# Altium PCB car_V1.0.PcbDoc
Units mil, origin at the board's own origin, x right, y up, seen from the top; angles counter-clockwise.
Board outline 2762.23 x 1557.14 mil, 2 copper layers (Top Layer, Bottom Layer), stack 50.044 mil thick; 119 components, 73 nets, 335 pads, 63 vias.
Unrouted connection lines stored in the file: 42.
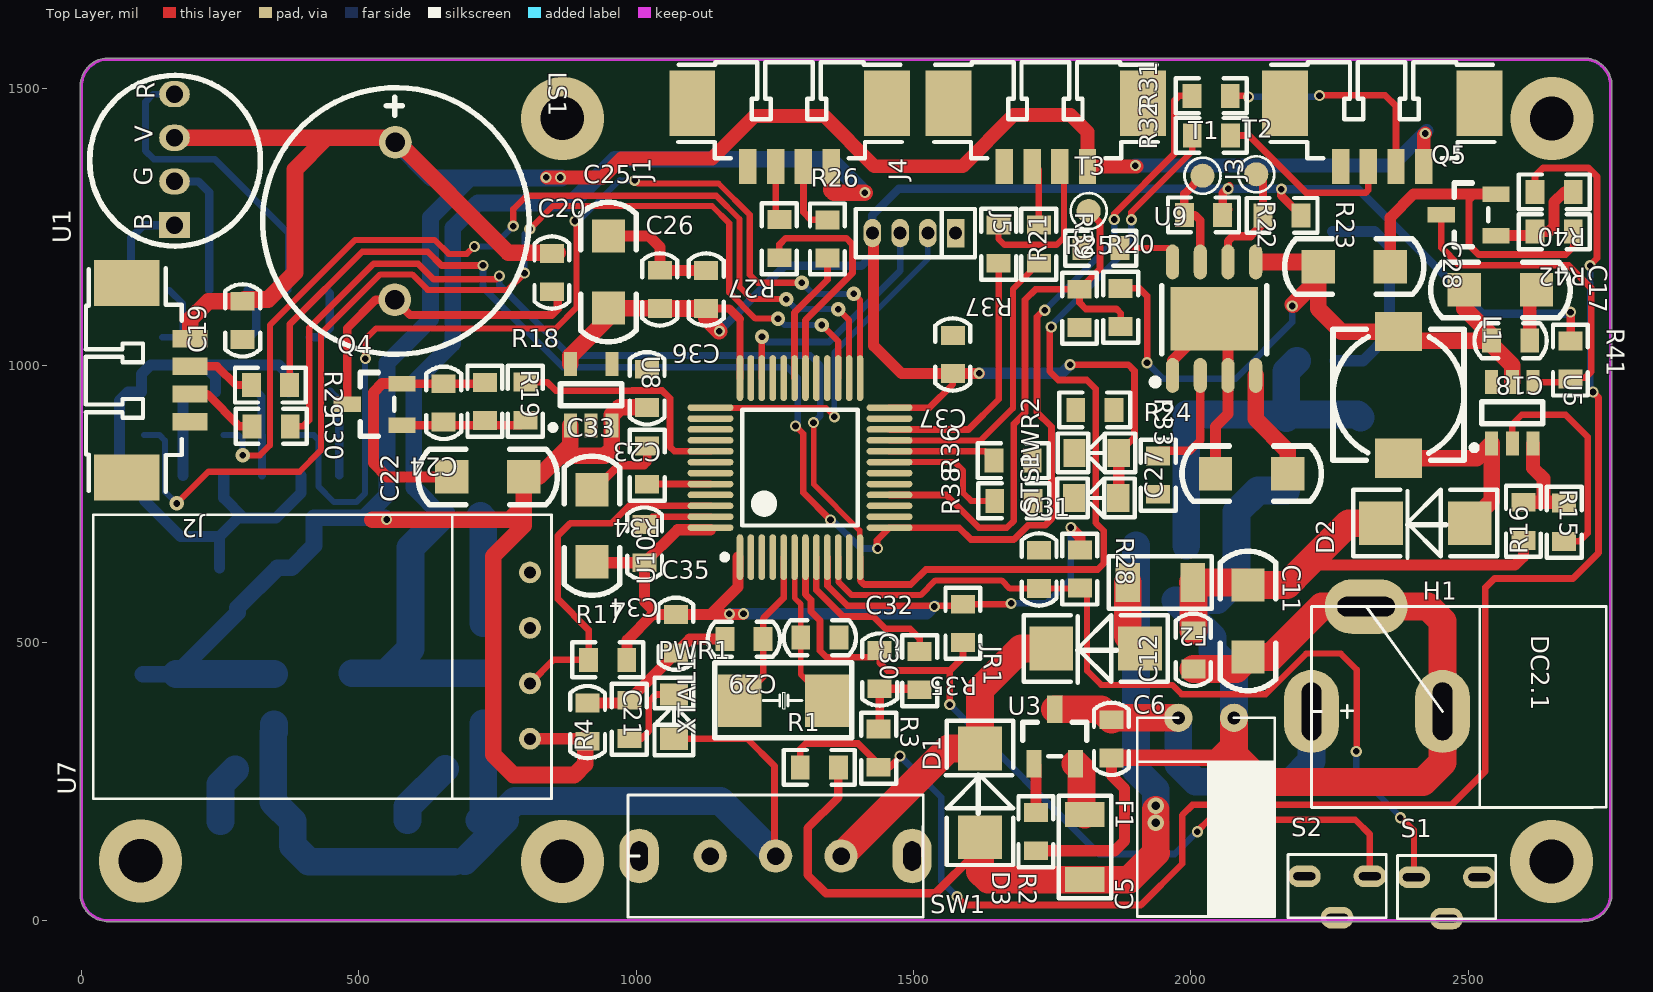
[diagram p0: Top Layer view]
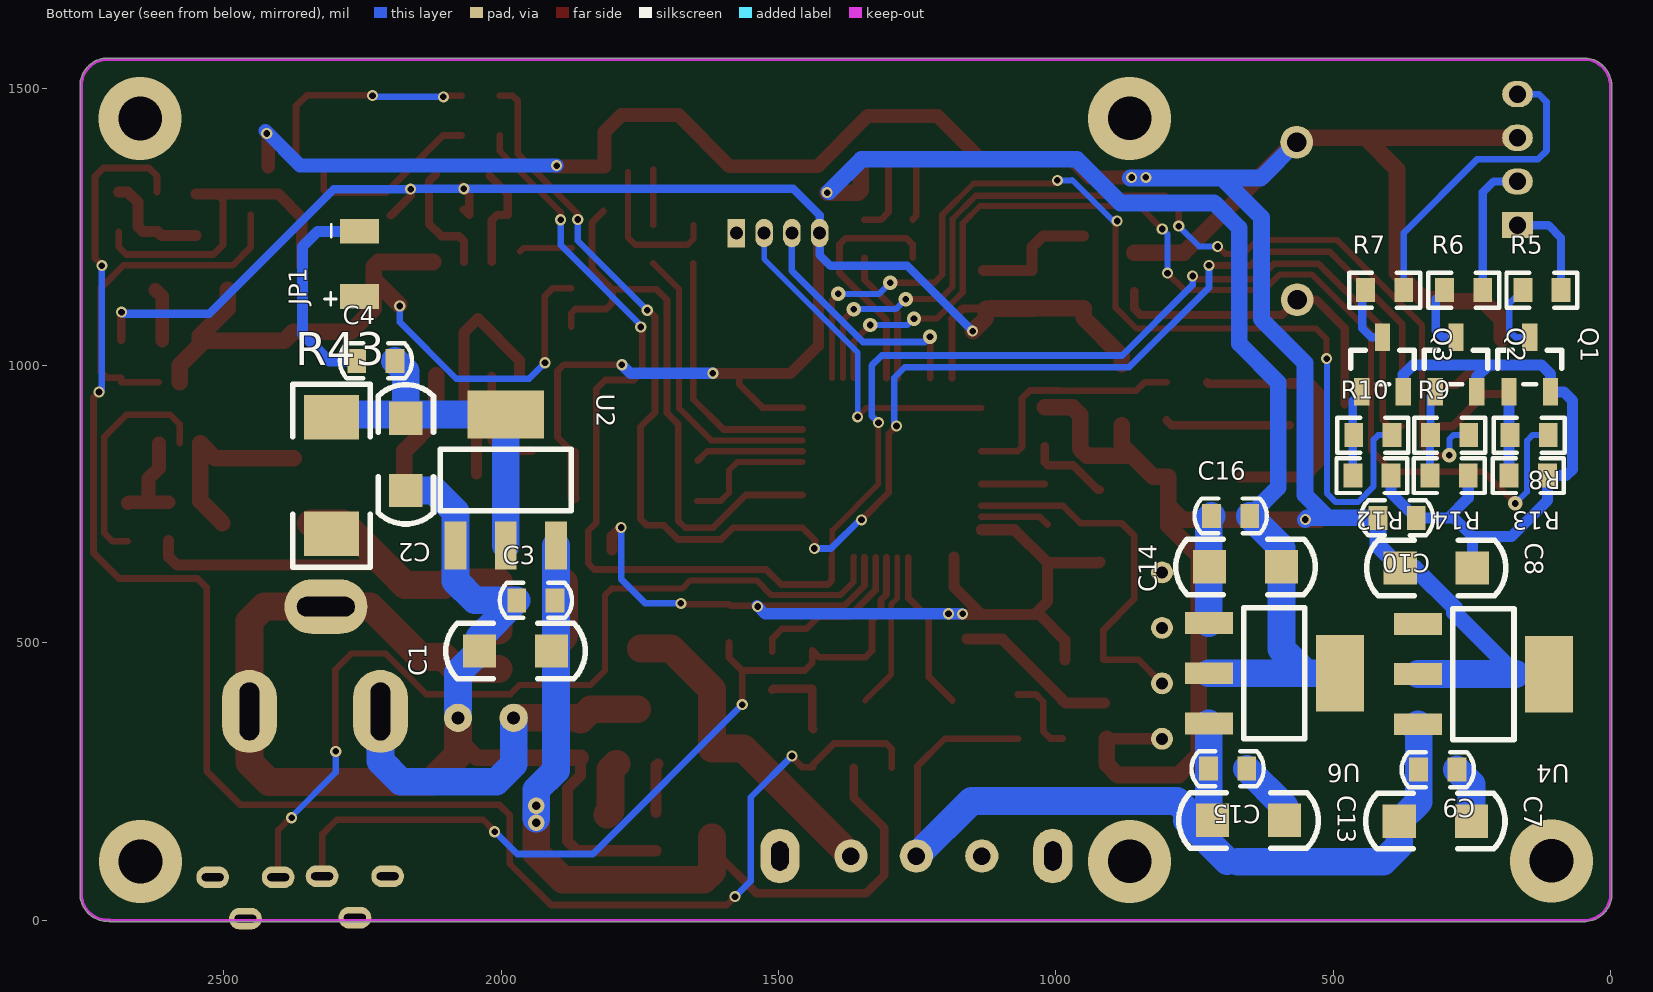
[diagram p1: Bottom Layer view, seen from below]
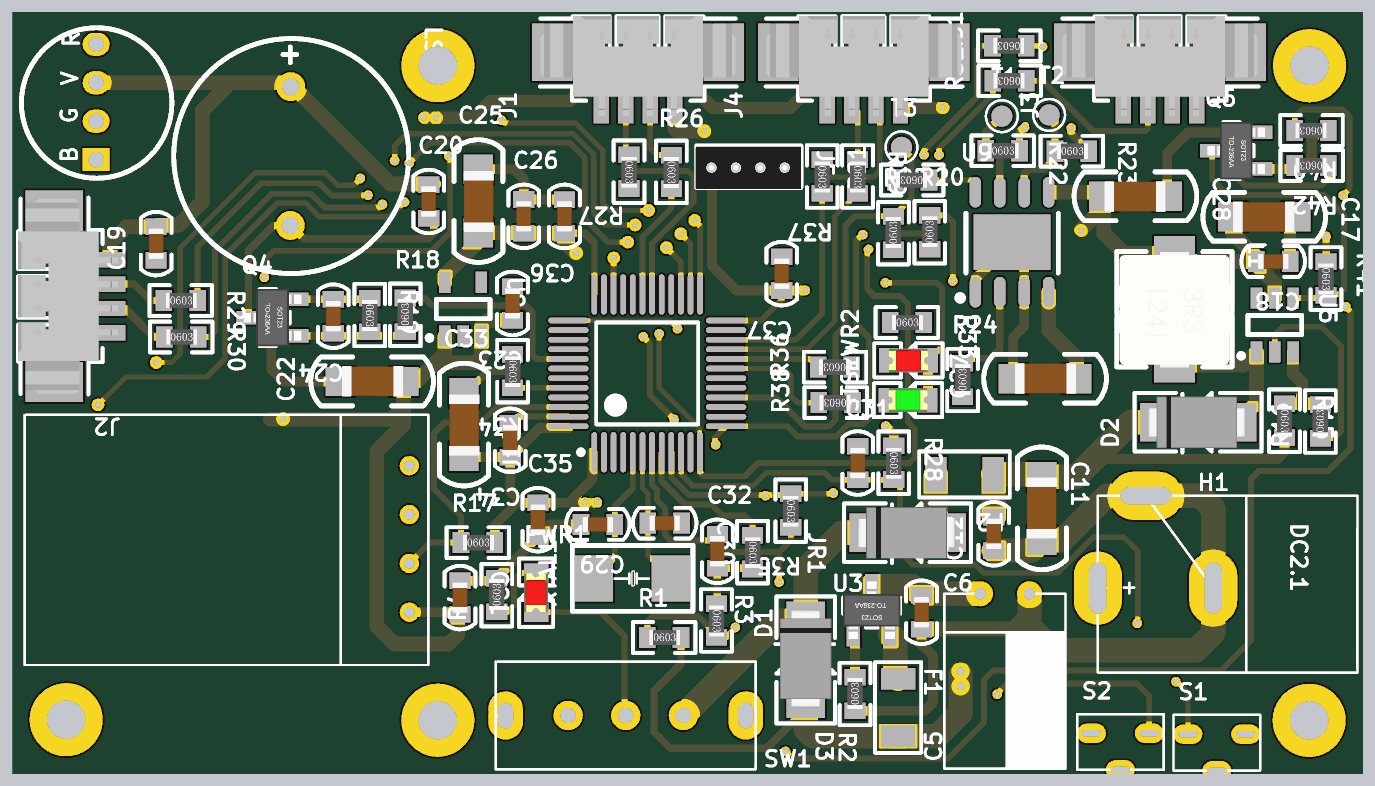
[diagram p2: 3D render of the assembled board from above, using the file's embedded part models]
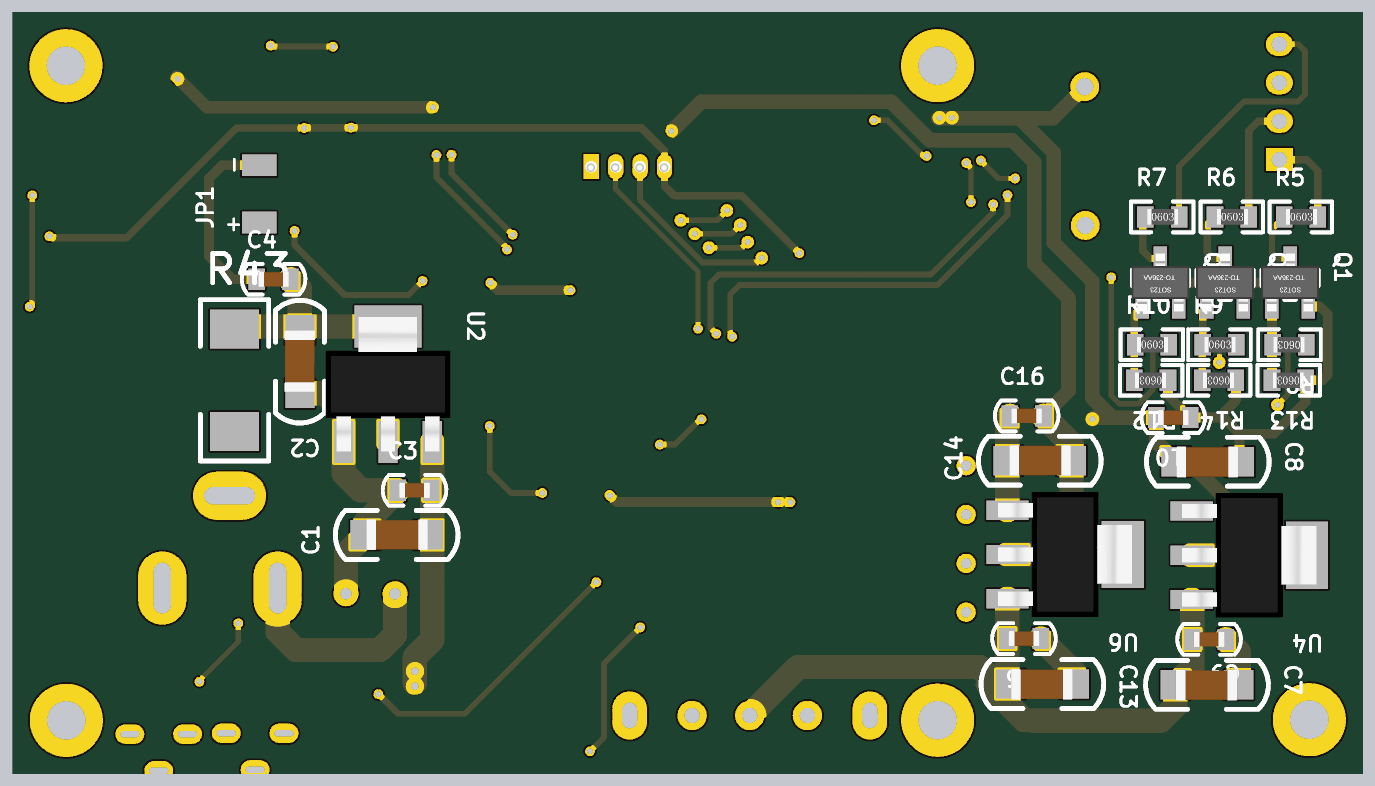
[diagram p3: 3D render of the assembled board from below, using the file's embedded part models]

## Layer stack, top to bottom
Top Solder: solder mask 0.4, Solder Resist, Dk 3.5
Top Layer: signal copper 1.4
Dielectric1: core 47.2441, FR-4, Dk 4.8
Bottom Layer: signal copper 1.4
Bottom Solder: solder mask 0.4, Solder Resist, Dk 3.5

## Board outline
-2.86,48.4 ccw(c47.23,47.37) 44.78,-2.67 ccw(c44.9,-0.16) 45.77,-2.51 2706.5,-2.51 ccw(c2706.5,0) 2707.64,-2.24 ccw(c2709.43,47.83) 2758.81,39.39 ccw(c2756.8,40.9) 2759.32,40.9 2759.32,1502.04 ccw(c2709.27,1504.43) 2759.37,1504.43 ccw(c2709.27,1504.43) 2713.6,1554.34 ccw(c2712.8,1551.96) 2712.8,1554.47 50.16,1554.47 ccw(c47.77,1504.43) -1.96,1510.47 ccw(c0,1508.9) -2.51,1508.9 -2.51,49.63 ccw(c-0.35,48.35)

## Design rules (kind name [scope] priority, off if disabled: settings)
Clearance [All] p1: gap=7.5
HoleSize [All] p1: absolutevalues=TRUE maxlimit=200 minlimit=1 maxpercent=80.000 minpercent=20.000
HoleToHoleClearance [All] p1: gap=2 allowstackedmicrovias=TRUE
MinimumSolderMaskSliver [All] p1: minsoldermaskwidth=-2
PolygonConnect PolygonConnect_1 [IsPad] p1: connectstyle=Relief reliefconductorwidth=10 reliefentries=4 polygonreliefangle="90 Angle" airgapwidth=10
PolygonConnect [All] p2: connectstyle=Direct reliefconductorwidth=10 reliefentries=4 polygonreliefangle="90 Angle" airgapwidth=10
RoutingVias [All] p1: holewidth=12 width=20 viastyle="Through Hole" minholewidth=12 minwidth=20 maxholewidth=28 maxwidth=50
SilkToSilkClearance [All] p1: silktosilkclearance=-10
SilkToSolderMaskClearance SilkscreenOverComponentPads [IsPad] p1: minsilkscreentomaskgap=-10 clearancetoexposedcopper=TRUE
SolderMaskExpansion [All] p1: expansion=4
Width [All] p1: maxlimit=80 minlimit=7 preferedwidth=10
25 further rules are at their usual default settings.

## Components (designator, comment, footprint, x,y, rotation, side; value= is the part's Value field where it differs from the comment)
C1 "10uF/16V" C1206C 1909.1,485.3 r0 bottom
C2 "22uF/16V" C1206C 2172.1,904.9 r270 bottom
C3 "0.1uF" C0603B 1937.5,576.6 r180 bottom
C4 "0.1uF" C0603B 2226.05,1008.6 r180 bottom
C5 "100uF/16V" CAP_6.3*7 1977.5,364.8 r90 top locked
C6 "0.1uF" C0603B 1856.9,327 r90 top
C7 "10uF/16V" C1206C 380.5,178.4 r180 bottom
C8 "22uF/16V" C1206C 378.8,635.1 r180 bottom
C9 "0.1uF" C0603B 311.2,271.5 r0 bottom
C10 "0.1uF" C0603B 384.55,725.3 r0 bottom
C11 "22uF/16V" C1206C 2103.2,604.5 r270 top
C12 "0.1uF" C0603B 2004.7,487.5 r90 top
C13 "10uF/16V" C1206C 717.4,179.9 r180 bottom
C14 "22uF/16V" C1206C 592.8,637.1 r0 bottom
C15 "0.1uF" C0603B 690.05,273 r0 bottom
C16 "0.1uF" C0603B 684.55,728.8 r180 bottom
C17 "22uF/16V" C1206C 2493.3,1136.5 r0 top
C18 "0.1uF" C0603B 2576.7,1044.9 r180 top
C19 "0.1uF" C0603B 290.2,1081.5 r90 top
C20 "0.1uF" C0603B 848.1,1167.7 r90 top
C21 "0.1uF" C0603B 912.2,357 r270 top
C22 "10uF/16V" C1206C 797.2,799.4 r180 top
C23 "0.1uF" C0603B 1019.5,959.05 r270 top
C24 "0.1uF" C0603B 652.8,932.9 r270 top
C25 "2.2uF/16V" C1206C 949.8,1103.6 r90 top
C26 "0.1uF" C0603B 1042.6,1137.3 r90 top
C27 "10uF/16V" C1206C 2174.7,805 r180 top
C28 "10uF/16V" C1206C 2229.7,1178.4 r0 top
C29 "22p" C0603B 1194.3,506.8 r180 top
C30 "22p" C0603B 1331.1,509.3 r0 top
C31 "0.1uF" C0603B 1726.3,632.4 r270 top
C32 "0.1uF" C0603B 1438.9,451.7 r90 top
C33 "4.7uF/16V" C1206C 920.2,646.1 r90 top
C34 "0.1uF" C0603B 1015,678.95 r270 top
C35 "0.1uF" C0603B 1071.7,516.4 r90 top
C36 "0.1uF" C0603B 1126,1137.2 r270 top
C37 "0.1uF" C0603B 1570.8,1020.05 r270 top
D1 "D Schottky" DO-214AC 1620.05,149.4 r90 top locked
D2 "D Schottky" DO-214AC 2502.9,716.15 r180 top
D3 "D Schottky" DO-214AC 1908.5,490 r180 top locked
F1 "3A/32V" LC-1206_L 1809,131.9 r270 top
F2 "3A/32V" LC-1206_L 1944.74,609 r180 top
H1 "DC" DC_2.1 2316.1,565.38 r180 top locked
J1 "UART1" SIPA4-1.27-SMT-H 1351.5,1359.1 r180 top
J2 "UART2" SIPA4-1.27-SMT-H 195.6,1048.7 r270 top locked
J3 "UART2" SIPA4-1.27-SMT-H 2420,1359.1 r180 top
J4 "UART3" SIPA4-1.27-SMT-H 1813.7,1359.1 r180 top
J5 "SWD" SIP4-1.27 1575.8,1238.9 r0 top
JP1 "LiPO" LiPO_2PIN 2261.5,1157.26 r90 bottom
JR1 "0R" R0603B 1511,450 r270 top
L1 "Inductor" L-6X6X3 2374.5,947.1 r270 top
LS1 "Bell" BEEP12*7.5 564.7,1402.7 r270 top locked
PWR1 "LED" LED0805R 1068,367 r90 top
PWR2 "LED" LED0805R 1830.1,842.4 r180 top
Q1 "S8050" SOT-23-3 138.5,1002.8 r270 bottom
Q2 "S8050" SOT-23-3 271.6,1002.8 r270 bottom
Q3 "S8050" SOT-23-3 403.9,1002.8 r270 bottom
Q4 "S8050" SOT-23-3 527.3,936.9 r0 top
Q5 "S8050" SOT-23-3 2500,1278.6 r0 top
R1 "4.7K" R0603B 1330.1,275.3 r0 top
R2 "100K" R0603B 1720.8,159.55 r90 top
R3 "1.2K" R0603B 1437.1,310 r270 top
R4 "4.7K" R0603B 987.5,362.05 r90 top
R5 "180" R0603B 123.3,1136.1 r180 bottom
R6 "180" R0603B 264.6,1136.1 r180 bottom
R7 "150" R0603B 407.1,1136.1 r180 bottom
R8 "4.7K" R0603B 146.55,874.6 r0 bottom
R9 "4.7K" R0603B 289.9,874.6 r180 bottom
R10 "4.7K" R0603B 428.3,874.6 r180 bottom
R12 "3.3K" R0603B 429.8,801.7 r0 bottom
R13 "3.3K" R0603B 148.05,801.7 r0 bottom
R14 "3.3K" R0603B 290.75,801.7 r0 bottom
R15 "19K" R0603B 2599.8,719.15 r270 top
R16 "1K" R0603B 2673.2,717.45 r90 top
R17 "4.7K" R0603B 948.6,469.5 r0 top
R18 "4.7K" R0603B 800.2,935.75 r90 top
R19 "3.3K" R0603B 727.3,935.3 r270 top
R20 "10K" R0603B 1873.6,1104.8 r90 top
R21 "10K" R0603B 1837.65,1211.7 r180 top
R22 "10K" R0603B 2022.9,1271.5 r0 top
R23 "10K" R0603B 2164.5,1270.7 r0 top
R24 "3K" R0603B 1941,802.4 r90 top
R25 "10K" R0603B 1799.3,1103 r90 top
R26 "120" R0603B 1344.8,1228.3 r270 top
R27 "120" R0603B 1258.2,1228.8 r270 top
R28 "4.7K" R0603B 1800,633.1 r270 top
R29 "120" R0603B 340.5,964.9 r0 top
R30 "120" R0603B 341.55,890.3 r0 top
R31 "120" R0603B 2036.6,1486.4 r180 top
R32 "120" R0603B 2037.15,1414.9 r180 top
R33 "1K" R0603B 1827,919.9 r0 top
R34 "10K" R0603B 1019.8,820.55 r270 top
R35 "10k" R0603B 1589.2,535.05 r270 top
R36 "10K" R0603B 1679.75,828.7 r180 top
R37 "120" R0603B 1653.6,1218.95 r270 top
R38 "1K" R0603B 1681.05,756 r180 top
R39 "120" R0603B 1725.9,1218.95 r270 top
R40 "4.7K" R0603B 2655.1,1313 r180 top
R41 "4.7K" R0603B 2684.6,1010 r270 top
R42 "3.3K" R0603B 2655.2,1241.5 r180 top
R43 "0.5" R2010 2306,696.5 r90 bottom
S1 "SW-PB" ce_switch_4.5*4.5*4.8 2461.2,2.6 r0 top locked
S2 "SW-PB" ce_switch_4.5*4.5*4.8 2263.84,4.4 r0 top locked
STS1 "LED" LED0805G 1829.1,761.3 r180 top
SW1 "switch" SW_SK-12E12 1369.4,115.6 r0 top locked
T1 "TEST" TEST_POINT 2021.2,1342.3 r0 top
T2 "TEST" TEST_POINT 2118,1344.9 r0 top
T3 "TEST" TEST_POINT 1815.8,1278.6 r0 top
U1 "LED" 5MM-LED 169.4,1259.26 r90 top locked
U2 "SE8117-5.0V" LC-SOT-223 2082.45,675.6 r270 bottom
U3 "PMOS" SOT-23-3 1761.7,332 r270 top
U4 "SE8117-5.0V" LC-SOT-223 346.92,534.25 r0 bottom
U5 "ME2159" LC-SOT-23-6 2542.5,859.76 r270 top
U6 "SE8117-5.0V" LC-SOT-223 724,535.75 r0 bottom
U7 "DHT11" DHT11-4PIN 808.4,327 r90 top locked
U8 "LN1134" LC-SOT-23-5 918.6,947.4 r270 top
U9 "ME4057" LC-SOP-8_EP_150mil 1967.1,982.14 r0 top
U10 "STM32F103C8T6" LQFP48_M_STM32 1295.37,815.92 r90 top locked
XTAL1 "8M" XL5032 1343.9,395.9 r180 top

## Footprints (in the part's own frame and the unit in brackets; to place one, negate y for a bottom-side part, rotate by r counter-clockwise, add the part's x,y. Pads: shape width x height; smd on the part's side, far side on the other; paste and mask are expansions set on the pad)
5MM-LED [mm]
  rect 1.2x1.4 hole 0.8: 1(-0.152,0.051)
  oval 1.2x1.4 hole 0.8: 2(1.848,0.051) 3(3.848,0.051) 4(5.848,0.051)
  silkscreen extent -1.11,-3.88 6.71,3.94
BEEP12*7.5 [mm]
  round 1.5 hole 0.9: 1(0,0.025) 2(7.214,0)
  silkscreen extent -2.5,-6.05 9.71,6.16
C0603B [mm]
  rect 0.862x1.1 smd: 1(-0.875,0) 2(0.875,0)
  silkscreen extent -1.66,-0.8 1.66,0.8, body extent -0.8,-0.4 0.8,0.4, height 0.6
C1206C [mil]
  rect 60x60 smd: 1(0,0) 2(130,0)
  silkscreen extent -61,-50 191,50, body extent 1,-32 127,31, height 37
CAP_6.3*7 [mm]
  round 1.3 hole 0.6: 1(0,0) 2(0,-2.55)
  silkscreen extent -9.09,-4.42 0,1.88, body extent -9.08,-4.42 -2.08,1.88, height 6.3
ce_switch_4.5*4.5*4.8 [mm]
  oval 1.5x1 hole 0.35 slot 1 at 0 deg: 1(-1.5,1.9) 2(1.5,1.9) 3(0,0)
  silkscreen extent -2.25,0 2.25,2.9, body extent -2.24,-1.91 2.26,2.9, height 4.5
DC_2.1 [mm]
  oval 2.5x3.8 hole 0.9 slot 2.65 at 90 deg: 1(2.5,4.801) 3(-3.5,4.8)
  oval 3.8x2.5 hole 0.9 slot 2.65 at 0 deg: 2(0,0)
  silkscreen extent -11,0 2.5,9.2, body extent -10.97,-0.03 2.46,9.17, height 10.8
DHT11-4PIN [mm]
  round 1 hole 0.55: 1(0,0) 2(2.54,0) 3(5.08,0) 4(7.62,0)
  silkscreen extent -2.74,-0.99 10.26,20
DO-214AC [mm]
  rect 2x2 smd: 1(0,0.006) 2(4.064,0.006)
  silkscreen extent -1.27,-1.52 5.33,1.58, body extent -0.46,-1.32 4.65,1.35, height 2.12
L-6X6X3 [mm]
  rect 1.8x2.15 smd: 1(-2.9,0) 2(2.9,0)
  silkscreen extent -3,-3 3,3, body extent -2.97,-2.85 3.03,2.85, height 2.65
LC-1206_L [mm]
  rect 1.13x1.8 smd: 1(-1.49,0) 2(1.49,0)
  silkscreen extent -2.36,-1.2 2.35,1.2
LC-SOP-8_EP_150mil [mm] "嘉立创商城库"
  rect 4x2.9 smd: 0(1.905,2.6)
  oval 0.6x1.6 smd: 1(0,0) 2(1.27,0) 3(2.54,0) 4(3.81,0) 5(3.81,5.2) 6(2.54,5.2) 7(1.27,5.2) 8(0,5.2)
  silkscreen extent -0.94,-0.45 4.31,4.1
LC-SOT-23-5 [mm]
  rect 1.1x0.6 smd: 1(1.4,-0.95) 2(1.4,0) 3(1.4,0.95) 4(-1.4,0.95) 5(-1.4,-0.95)
  silkscreen extent -0.5,-1.87 1.62,1.4
LC-SOT-23-6 [mm]
  rect 1.1x0.6 smd: 1(0,0) 2(0,0.95) 3(0,1.9) 4(-2.8,1.9) 5(-2.8,0.95) 6(-2.8,0)
  silkscreen extent -1.9,-0.92 0.32,2.35
LC-SOT-223 [mm]
  rect 2.2x1 smd: 1(0,0) 2(0,2.3) 3(0,4.6)
  rect 2.2x3.5 smd: 2(-6,2.3)
  silkscreen extent -4.4,-0.7 -1.6,5.3, body extent -6.49,-0.94 0.49,5.54, height 1.64
LED0805G [mil]
  rect 40x50 smd: 1(-40,0) 2(40,0)
  silkscreen extent -70,-35 70,35, body extent -40,-25 40,25, height 43
LED0805R [mil]
  rect 40x50 smd: 1(-40,0) 2(40,0)
  silkscreen extent -70,-35 70,35, body extent -40,-24 40,25, height 43
LiPO_2PIN [mm]
  rect 1.13x1.8 smd: 1(-0.83,-0.152) 2(2.15,-0.152)
  silkscreen extent -1.22,0.91 2.46,1.45
LQFP48_M_STM32 [mm] "Thin QFP, 48-Leads, Body 7x7mm, Pitch 0.5mm, IPC Low Density"
  oval 2.1x0.3 smd: 1(-4.1,2.75) 2(-4.1,2.25) 3(-4.1,1.75) 4(-4.1,1.25) 5(-4.1,0.75) 6(-4.1,0.25) 7(-4.1,-0.25) 8(-4.1,-0.75) 9(-4.1,-1.25) 10(-4.1,-1.75) 11(-4.1,-2.25) 12(-4.1,-2.75) 25(4.1,-2.75) 26(4.1,-2.25) 27(4.1,-1.75) 28(4.1,-1.25) 29(4.1,-0.75) 30(4.1,-0.25) 31(4.1,0.25) 32(4.1,0.75) 33(4.1,1.25) 34(4.1,1.75) 35(4.1,2.25) 36(4.1,2.75)
  oval 0.3x2.1 smd: 13(-2.75,-4.1) 14(-2.25,-4.1) 15(-1.75,-4.1) 16(-1.25,-4.1) 17(-0.75,-4.1) 18(-0.25,-4.1) 19(0.25,-4.1) 20(0.75,-4.1) 21(1.25,-4.1) 22(1.75,-4.1) 23(2.25,-4.1) 24(2.75,-4.1) 37(2.75,4.1) 38(2.25,4.1) 39(1.75,4.1) 40(1.25,4.1) 41(0.75,4.1) 42(0.25,4.1) 43(-0.25,4.1) 44(-0.75,4.1) 45(-1.25,4.1) 46(-1.75,4.1) 47(-2.25,4.1) 48(-2.75,4.1)
  silkscreen extent -4.22,-2.65 2.65,3.57, body extent -3.5,-3.5 3.5,3.5, height 1.6
R0603B [mm]
  rect 0.862x1.1 smd: 1(-0.875,0) 2(0.875,0)
  silkscreen extent -1.63,-0.8 1.62,0.8, body extent -0.77,-0.4 0.83,0.4, height 0.45
R2010 [mil]
  rect 80x100 smd: 1(0,0) 2(210,0)
  silkscreen extent -60,-70 270,70
SIP4-1.27 [mm]
  rect 0.8x1.3 hole 0.6: 1(0,0)
  oval 0.8x1.3 hole 0.6: 2(-1.27,0) 3(-2.54,0) 4(-3.81,0)
  silkscreen extent -4.57,-1.1 0.89,1.1, body extent -4.62,-1.15 0.87,1.05, height 1.2
SIPA4-1.27-SMT-H [mm]
  rect 0.8x1.6 smd: 1(3.81,0) 2(2.54,0) 3(1.27,0) 4(0,0)
  rect 2.1x3 smd: ""(-2.55,-2.9) ""(6.36,-2.9)
  silkscreen extent -3.23,-4.78 7.01,-0.38, body extent -3.17,-4.79 6.98,0.41, height 3.4
SOT-23-3 [mm]
  rect 1.25x0.7 smd: 1(1.275,-1.125) 2(-1.225,-0.175) 3(1.275,0.775)
  silkscreen extent -0.62,-1.63 0.93,1.29, body extent -1.47,-1.67 1.53,1.33, height 1.3
SW_SK-12E12 [mil]
  round 60 hole 31.5: 1(0,0) 2(-118,0) 3(-236,0)
  oval 70.87x98.43 hole 31.5 slot 52.76 at 90 deg: 4(-364,0) 5(128,0)
  silkscreen extent -384,-110 148,110, body extent -385,-306 147,110, height 236
TEST_POINT [mm]
  round 1.1 smd: 1(0,0)
  silkscreen extent -0.82,-0.83 0.83,0.83
XL5032 [mm]
  rect 2x2.4 smd: 1(0,0) 2(4,0)
  silkscreen extent -1.14,-1.73 5.13,1.7, body extent -0.84,-1.73 4.75,1.7, height 1.5

## Part data
C1 C2 C5 C7 C8 C11 C13 C14 C17 C22 C25 C27 C28 C33: library part "Cap Pol1", "Polarized Capacitor (Radial)"
C3 C4 C6 C9 C10 C12 C15 C16 C18 C19 C20 C21 C23 C24 C26 C29 C30 C31 C32 C34 C35 C36 C37: library part Cap, "Capacitor"
D1 D2 D3: "Schottky Diode"
F1 F2: library part "Fuse 1", "Fuse"
H1: library part DC2.1mm, "电池电源插座"
J1 J2 J3 J4 J5: library part "Header 4", "Header, 4-Pin"
JP1: library part CON2
JR1: library part Res1, "Resistor"
LS1: "Electrical Bell"
Q1 Q2 Q3 Q4 Q5: library part NPN, "NPN Bipolar Transistor"
R1 R2 R3 R4 R5 R6 R7 R8 R9 R10 R12 R13 R14 R15 R16 R17 R18 R19 R20 R21 R22 R23 R24 R25 R26 R27 R28 R29 R30 R31 R32 R33 R34 R35 R36 R37 R38 R39 R40 R41 R42 R43: library part Res3, "Resistor"
S1 S2: "Switch"
SW1: library part Switch_3
T1 T2 T3: library part TEST_POINT
U1: library part 5MM-LED
U2 U4 U6: library part SE8117, "降压稳压芯片，该系列最大1A输出"
U3: "单个PMOS"
U5: "单节锂电池升压芯片，最大12V"
U8: "3.3V LDO"
U9: "单节锂电池充电芯片"
U10: library part STM32F101C8T6, "STM32 ARM-based 32-bit MCU with 64 Kbytes Flash, 48-pin LQFP, Industrial Temperature"
XTAL1: library part XTAL, "Crystal Oscillator"

## Via types
v1: diameter 20, hole 12, Top Layer to Bottom Layer, 47 vias
v2: diameter 26, hole 12, Top Layer to Bottom Layer, 9 vias
v3: diameter 149.61, hole 78.74, Top Layer to Bottom Layer, 5 vias
v4: diameter 29.53, hole 15.75, Top Layer to Bottom Layer, 2 vias

## Nets (pads, with @x,y where several pads share a name; then routed paths per layer and width w, separated by ;. In a path a pad name is that pad's centre, name@x,y a point inside that pad or via, vN(x,y) a via of type N, cw(c..) or ccw(c..) an arc to the next point about the centre after c; other vN are vias at no path point)
3V3-STM: C25.1 C26.1 C33.1 C34.2 C35.2 C36.2 C37.2 J5.4 PWR2.1 R17.2 R22.2 R23.2 R28.1 R35.1 R41.1 STS1.1 U8.5 U10.1 U10.9 U10.24 U10.36 U10.48 | length 5351.9
  Top Layer w12: C36.2@1119.2,1099.9 C36.2@1126,1099.9 ; U10.36 1187.1,1083.82 ; U10.9 1344.86,654.22 1344.86,602.89 1380.75,567 1435.58,567 1435.98,566.6 1586.3,566.6 R35.1 v1@1677.2,569.5 ; U10.24 1528.89,924.18 1570.8,966.1 C37.2 ; v1(1782.5,1001.4) 1887.5,1001.4 1898.5,990.4 1898.5,870.8 PWR2.1
  Top Layer w15: C36.2 1167.76,1102.75 1186.68,1083.82 ; R22.2@2067.4,1281.55 R22.2 2057.35,1310.95 v1@2069.7,1323.3 ; v1@2162.9,1315 2162.9,1306.75 R23.2 ; R41.1@2685.4,1046.7 v1@2685.4,1095
  Top Layer w20: C33.1 921.8,644.5 C34.2 ; R17.2 983.05,504.65 1029.25,550.85 1038.55,550.85 ; U10.48@1133.96,703.93 1074.43,703.93 C34.2 ; U10.1@1183.38,654.5 1183.38,600.48 1133.75,550.85 ; v1@1193.25,550.85 1133.75,550.85 ; J5.4 1428.1,1236.6 1428.1,1035.8 1478.3,985.6 C37.2 v1@1618.9,985.6 ; v1@1784.9,706.4 1800,691.3 R28.1 ; STS1.1 1870.1,762.3 PWR2.1 ; C34.2 1015,574.4 1038.55,550.85 ; 1038.55,550.85 C35.2 1133.75,550.85
  Top Layer w30: U8.5 881.2,1017.6 949.8,1086.2 C25.1 1041.85,1103.6 C26.1 1116.25,1102.85 C36.2@1119.2,1099.9 ; C36.2 1126,1099.9 1126,1085.3 v1@1149.2,1062.1
  Bottom Layer w12: v1(1676,571.1) 1739.7,571.1 1783.7,615.1 v1(1783.7,708)
  Bottom Layer w15: v1(1149.9,1062.1) 1267.6,1179.8 1406,1179.8 1425.8,1199.6 J5.4 1425.8,1271.3 1473.4,1318.9 v1(2067.4,1318.9) 2162.5,1318.9 v1(2163.3,1318.1) 2301.8,1318.1 2526.2,1093.7 v1@2679.2,1093.7
  Bottom Layer w20: v1@1169.3,552.4 v1(1193.3,552.4) 1523.9,552.4 v1@1538.7,567.2 ; v1(1618.3,986.1) 1767.2,986.1 v1(1782.5,1001.4)
  other v1: 1168,552.2 1537.5,565.5 2684.8,1096.4
5V-2G: C14.1 C16.2 J1.4 U6.2 | length 2051.9
  Top Layer w30: J1.4 1351.5,1316.3 1356.1,1311.7 v1(1412.2,1311.7)
  Bottom Layer w30: C16.2 599,779.9 599,969.5 669.1,1039.6 669.1,1248.2 714.1,1293.2 883.2,1293.2 961.8,1371.8 1350.6,1371.8 v1@1408.9,1313.5
  Bottom Layer w50: U6.2@487.78,445.2 549,445.2 ; C16.2 592.8,671.5 C14.1 592.8,489 549,445.2 ; U6.2@724,445.2 549,445.2
5V-CHA: C2.1 C4.2 R21.2 R43.2 U2.2 | length 664.3
  Bottom Layer w50: U2.2@1991.9,675.6 1991.9,911.82 C2.1@2172.1,911.82 ; C2.1 C2.1@2172.1,911.82 ; C4.2 2172.1,989.1 C2.1@2172.1,911.82 ; R43.2 2300.68,911.82 C2.1@2172.1,911.82
5V-DEV: C8.1 C10.2 C19.2 C20.2 C21.2 C22.1 C23.2 J2.4 J3.4 J4.4 LS1.1 U1.3 U4.2 U7.1 U8.1 U8.3 | length 6474.6
  Top Layer w20: U7.1 C21.2@907.75,327
  Top Layer w25: v1@838.8,1339.1 v1(863.2,1339.1) 939.5,1339.1 973.6,1373.2 1136.4,1373.2 1213.2,1450 1339.1,1450 1429.8,1359.3 1588,1359.3 1680.4,1451.7 1783.3,1451.7 1813.7,1421.3 J4.4 v1@1902.1,1359.1 ; J3.4 2420,1415.7 v1(2422.8,1418.5)
  Top Layer w30: U1.3 441.5,1410.74 ; J2.4 195.6,1082.9 228.65,1115.95 C19.2 293.45,1119.2 336.3,1119.2 384.6,1167.5 384.6,1353.84 441.5,1410.74 ; 524,722 771.4,722 797.2,747.8 ; C20.2@858.2,1203.45 769.25,1203.45 561.96,1410.74 441.5,1410.74 ; U8.1 881.2,856.7 862.2,837.7 ; C21.2@907.75,327 907.75,281.05 888.5,261.8 778.5,261.8 741.9,298.4 741.9,656.2 797.2,711.5 797.2,747.8 ; C23.2 969.5,924.6 956,911.1 U8.3 956,849.9 943.8,837.7 862.2,837.7 ; 797.2,747.8 C22.1 823.9,799.4 862.2,837.7
  Bottom Layer w25: v1(1900,1360.5) 2362.5,1360.5 v1@2425.5,1423.5
  Bottom Layer w30: U4.2@110.7,443.7 170.6,443.7 281.11,554.21 281.11,563.26 352.96,635.1 C8.1 419,675.3 C10.2 509.4,725.3 ; v1(550,722.3) 547,725.3 509.4,725.3 ; LS1.1 630.3,1338.1 699.9,1338.1 ; v1@865.5,1338.1 699.9,1338.1 ; 509.4,725.3 550.7,766.6 550.7,1004.9 629,1083.2 629,1267.2 699.9,1338.1
  Bottom Layer w50: 170.6,443.7 U4.2@346.92,443.7
  other v1: 837.6,1339.3
12V: D1.2 D3.2 SW1.1 | length 597.6
  Top Layer w40: 1688.75,488.35 1689.94,488.35
  Top Layer w50: SW1.1 1563.2,309.4 D1.2 1619.8,415.8 1693.75,489.75 D3.2
12V-DC: C1.1 C3.2 D1.1 F1.2 R1.2 U2.3 | length 1555.3
  Top Layer w15: R1.2 1364.55,221.35 1309.1,165.9 1309.1,81.7 1342.3,48.5 1539.84,48.5 1612.24,120.9 D1.1@1619.8,120.9
  Top Layer w50: D1.1@1619.8,115 1619.8,87.8 1634.8,72.8 1888.5,72.8 1937.1,121.4 1936.6,121.9 v4@1936.6,198.9 ; D1.1@1619.8,120.9 D1.1
  Bottom Layer w50: U2.3 1901.35,576.6 1901.35,270.45 1936.9,234.9 v4@1936.9,183.1
  other v4: 1936.8,175.5 1936.6,206.3
12V-O: C7.1 C9.2 C13.1 C15.2 PWR1.1 SW1.2 U4.3 U6.3 | length 1792.1
  Top Layer w12: PWR1.1 1200.1,327 1249.2,277.9 1249.2,117.8 SW1.2
  Bottom Layer w50: U4.3 347,353.07 347,339.6 345.65,338.25 C9.2 345.65,213.25 C7.1 380.5,134.6 409.9,105.2 671.6,105.2 ; 690.8,106.7 764,179.9 C13.1@746.3,179.9 ; U6.3 724,186.5 C13.1 C13.1@746.3,179.9 ; C13.1@744.8,178.4 C13.1@746.3,179.9 ; SW1.2 1152.1,214.9 781.3,214.9 C13.1@746.3,179.9
12V_EN: R1.1 R3.2 R40.2 | length 3055.1
  Top Layer w12: R1.1 1295.65,308.65 1305.6,318.6 1400.2,318.6 1437.1,281.7 R3.2 1456.95,275.55 v1@1476.2,294.8 ; v1(1578.4,42.3) 1593.4,27.3 1910,27.3 1984.5,101.8 1984.5,189.3 2003.1,207.9 2299.6,207.9 2299.9,208.2 2387.53,208.2 2387.83,207.9 2470.2,207.9 2531.2,268.9 2531.2,599.8 2547.5,616.1 2689.1,616.1 2735.2,662.2 2735.2,942.4 v1(2725.2,952.4) ; R40.2 2620.65,1341.75 2635.1,1356.2 2717.1,1356.2 2732.5,1340.8 2732.5,1193.6 v1@2719.2,1180.3
  Bottom Layer w12: v1(1475.7,295.9) 1550,221.6 1550,70.7 v1(1578.4,42.3) ; v1@2720,953.3 v1(2720,1180.2)
BEEP: R18.2 U10.41 | length 437
  Top Layer w12: R18.2 839.4,970.2 854.8,954.8 991.99,954.8 992.25,955.07 1046.75,955.07 1060.8,941.01 1060.8,853.4 1068.76,845.44 U10.41
BOOT0: R34.2 U10.44 | length 114.3
  Top Layer w12: R34.2 1020.09,786.39 U10.44
BOOT1: R36.2 U10.20 | length 195.4
  Top Layer w12: U10.20 1628.56,845.44 R36.2
CAL_KEY: C31.2 R28.2 S1.1 U10.10 | length 1616.7
  Top Layer w11: U10.10 1365.05,653.72 1365.05,609.57 1388.62,586 1512.9,586 1539.55,612.65 1658.95,612.65 1673.65,597.95 C31.2 1799.3,597.95 R28.2 1812.9,585.75 1812.9,449.7 1838.3,424.3 1966.6,424.3 1983.5,407.4 2135.13,407.4 2208.23,480.5 2270.4,480.5 2299.3,451.6 2299.3,315.2 ; v1@2377.5,187.1 2402.14,162.46 S1.1
  Bottom Layer w11: v1(2298.3,304.3) 2298.3,266.4 2377.8,186.9 v1(2377.8,184.7)
DHT11_D: R17.1 U7.2 U10.46 | length 667.7
  Top Layer w12: U7.2 850.9,469.5 R17.1 914.15,523.45 858.7,578.9 858.7,693.4 880.8,715.5 954.9,715.5 986.42,747.02 U10.46
GND: C1.2 C2.2 C3.1 C4.1 C5.2 C6.1 C7.2 C8.2 C9.1 C10.1 C11.2 C12.1 C13.2 C14.2 C15.1 C16.1 C17.2 C18.1 C19.1 C21.1 C22.2 C23.1 C24.1 C25.2 C26.2 C27.2 C28.2 C29.2 C30.2 C31.1 C32.1 C33.2 C34.1 C35.1 C36.1 C37.1 H1.2 H1.3 J1.1 J2.1 J3.1 J4.1 J5.1 JP1.2 JR1.2 Q1.3 Q2.3 Q3.3 Q4.3 Q5.3 R2.1 R3.1 R4.2 R12.1 R13.1 R14.1 R16.1 R19.1 R24.1 R25.1 R33.2 R34.1 R36.1 R42.1 S1.2 S2.1 U2.1 U4.1 U5.2 U6.1 U7.4 U8.2 U9.0 U9.1 U9.3 U10.23 U10.35 U10.47 | length 7409.2
  Top Layer w12: C34.1 1029.03,727.43 U10.47@1133.96,727.43 ; 2513.41,1309.11 2501.7,1297.4 2501.7,1217.4 2518.8,1200.3 2676,1200.3 2689.65,1213.95 R42.1 ; U5.2 2579.9,894.3 2596.8,911.2 2675.7,911.2 2715.7,871.2 2715.7,698.2 2700.5,683 R16.1
  Top Layer w15: Q4.3 652.74,967.41 C24.1 724.9,967.35 R19.1 ; C33.2 924.63,776.1 969.03,820.5 1014.6,820.5 1019.8,825.7 R34.1 ; R3.1 1438.9,346.25 C32.1 1509.3,417.25 JR1.2
  Top Layer w20: Q4.3 541.71,967.41 526,951.7 526,824.2 550.8,799.4 C22.2 ; C21.1 982.45,391.45 R4.2 987.5,397.75 C35.1 1096.55,506.8 C29.2 ; C25.2 1022.6,1233.6 1042.6,1213.6 C26.2 C36.1@1130.1,1171.75 ; R2.1 1862.4,125.1 1880.4,143.1 1880.4,237.5 1856.9,261 C6.1 ; U9.1 1967.1,1009.5 U9.0 2067.1,1059.5 U9.3 2067.1,912.4 2044.7,890 C27.2 ; C28.2 2359.7,1267 2401.81,1309.11 2513.41,1309.11 Q5.3
  Top Layer w25: C18.1 2611.15,1124.35 C17.2
  Top Layer w30: C6.1 2043.55,292.55 2077.89,326.89
  Top Layer w50: C12.1 2081.75,453.05 C11.2 2145.1,474.5 2235.98,565.38 H1.2 2427.42,565.38 2453.9,538.9 H1.3 2453.9,284.2 2418.8,249.1 2126.5,249.1 2077.89,297.71 2077.89,326.89 C5.2
  Bottom Layer w20: Q2.3 241.09,979.21 219.1,1001.2 ; C8.2 248.8,692.1 ; R14.1 256.3,761 292,725.3 ; Q3.3 373.39,983.61 355.8,1001.2 219.1,1001.2 ; R12.1 395.35,770.55 C10.1 292,725.3 ; JP1.2 2331.28,1241.92 2358.3,1214.9 2358.3,1056.5 2310.4,1008.6 C4.1 ; 219.1,1001.2 124.4,1001.2 107.99,984.79 Q1.3 83.9,952.6 68.3,937 68.3,813 79.6,801.7 R13.1 113.6,756.9 178.4,692.1 248.8,692.1 ; 248.8,692.1 282,725.3 292,725.3
  Bottom Layer w50: C7.2 250.5,245.25 C9.1 ; C13.2 587.4,204.8 C15.1 ; C16.1 724,723.8 U6.1 ; C5.2 2077.89,446.51 C1.2 2039.1,509.45 C3.1 2047.7,576.6 2082.45,611.35 U2.1 2082.45,736.25 2121.1,774.9 C2.2
LED: R38.2 U10.19 | length 242.5
  Top Layer w11: U10.19 1574.54,825.76 1589.2,811.1 1589.2,770.5 1603.7,756 R38.2
LIPO+: C17.1 C18.2 C28.1 JP1.1 L1.1 R20.2 U5.5 U9.5 | length 1310
  Top Layer w12: R20.2 1907.45,1139.25 1921.3,1125.4 v1@1921.3,1003.1
  Top Layer w30: U9.5@2122.4,1186.86 2221.24,1186.86 C28.1 C28.1@2229.7,1155.7 ; v1@2184.2,1110.2 C28.1@2229.7,1155.7 ; C17.1 2493.3,1102.9 2543,1053.2 2543,1045.65 C18.2 2542.25,1037.85 2579.9,1000.2 U5.5 ; C18.2@2540.6,1044.9 2390.87,1044.9 L1.1 2271.03,1061.27 2229.7,1102.6 C28.1@2229.7,1155.7
  Bottom Layer w12: v1(1920.9,1005.1) 1949.7,976.3 2081,976.3 2183,1078.3 v1(2183,1107.5)
LIPO_AD: R20.1 R25.2 T3.1 U10.16 | length 1062
  Top Layer w12: U10.16 1559,766.7 1618.2,707.5 1668.2,707.5 1681,720.3 1681,894.5 1701,914.5 1701,1118.6 1719.85,1137.45 R25.2 ; T3.1 1836.4,1258 1836.4,1174.55 R25.2 ; R20.1 1873.6,1094.3 1865.9,1102 1810.7,1102 1799.3,1113.4 R25.2
LIPO_C: R22.1 T1.1 U9.7 | length 192
  Top Layer w15: U9.7 2017.1,1261.8 2007.4,1271.5 R22.1 1988.45,1309.55 T1.1
LIPO_EN: U10.17
LIPO_S: R23.1 T2.1 U9.6 | length 207.7
  Top Layer w15: U9.6 2067.1,1224.3 2076.16,1233.36 2107.96,1233.36 2130.05,1255.45 R23.1 2130.05,1332.85 T2.1
NetC5_1: C5.1 C6.2 H1.1 U3.2 | length 673.8
  Top Layer w50: U3.2 1838.12,380.23 C6.2 1860.25,364.8 C5.1
  Bottom Layer w50: C5.1 1977.5,280.9 2008.7,249.7 2180.5,249.7 2217.68,286.88 H1.1
NetC11_1: C11.1 C12.2 D2.2 F2.1 R15.2 | length 901.3
  Top Layer w20: 2203.35,634.55 2209.2,640.4 2584.9,640.4 2599.8,655.3 R15.2
  Top Layer w50: C12.2 2004.7,607.7 F2.1 2098.7,609 C11.1 2173.3,604.5 2203.35,634.55 ; 2209.2,640.4 2284.7,715.9 D2.2
NetC20_1: C20.1 LS1.2 Q4.2 | length 586.3
  Top Layer w15: Q4.2 479.07,1067.57 530.2,1118.7 LS1.2 592.2,1091.2 847.4,1091.2 858.2,1102 C20.1@858.2,1134.55
NetC24_2: C24.2 Q4.1 R18.1 R19.2 | length 226.3
  Top Layer w15: Q4.1 791.51,892.61 R18.1
NetC27_1: C27.1 R43.1 U9.4 | length 201
  Top Layer w30: U9.4 2117.1,903.8 2174.7,846.2 C27.1
NetC29_1: C29.1 U10.5 XTAL1.2 | length 291.5
  Top Layer w12: XTAL1.2 1228.75,438.23 C29.1 1228.75,543.65 1265.84,580.74 U10.5
NetC30_1: C30.1 U10.6 XTAL1.1 | length 282.8
  Top Layer w10: U10.6 1285.53,580.91 1296.65,569.79 C30.1 1296.65,443.15 XTAL1.1
NetD2_1: D2.1 L1.2 U5.1 | length 339.4
  Top Layer w30: L1.2 2515.66,832.93 U5.1 2542.5,755.5 D2.1
NetD3_1: D3.1 F2.2 | length 128.5
  Top Layer w50: F2.2 1886.08,512.17 D3.1
NetF1_1: F1.1 U3.3 | length 98.2
  Top Layer w50: U3.3 1802.75,271.27 1802.75,196.81 F1.1
NetJ1_2: J1.2 R27.1 | length 97.9
  Top Layer w12: J1.2@1251.5,1358.4 1251.5,1269.95 R27.1
NetJ1_3: J1.3 R26.1 | length 130.8
  Top Layer w12: J1.3@1301.5,1358.4 1301.5,1276.6 1315.35,1262.75 R26.1
NetJ2_2: J2.2 R30.1 | length 135.7
  Top Layer w15: J2.2 226.5,948.7 284.9,890.3 R30.1
NetJ2_3: J2.3 R29.1 | length 124.5
  Top Layer w15: J2.3 244.4,998.7 278.2,964.9 R29.1
NetJ3_2: J3.2 R32.1 | length 335.7
  Top Layer w12: R32.1 2104.7,1414.9 2207.7,1311.9 2315.6,1311.9 2320,1316.3 J3.2
NetJ3_3: J3.3 R31.1 | length 417.8
  Top Layer w12: R31.1 2102.5,1486.4 v1(2104.3,1484.6) ; v1@2231.6,1487.2 2350.6,1487.2 2370,1467.8 J3.3
  Bottom Layer w12: v1(2104.3,1484.6) 2229.9,1484.6 v1(2232.1,1486.8)
NetJ4_2: J4.2 R39.1 | length 99.8
  Top Layer w11: R39.1 J4.2@1725.9,1353.2
NetJ4_3: J4.3 R37.1 | length 270.4
  Top Layer w11: R37.1 1653.6,1228.1 1663.8,1217.9 1758,1217.9 1771.5,1231.4 J4.3@1771.5,1348.8
NetPWR1_2: PWR1.2 R4.1 | length 144.6
  Top Layer w12: R4.1 1009.8,327.6 1022.65,340.45 1022.65,393.75 1035.9,407 PWR1.2
NetPWR2_2: PWR2.2 R33.1
NetQ1_1: Q1.1 R8.2 R13.2 | length 151
  Bottom Layer w20: R13.2 182.5,952.31 Q1.1
NetQ1_2: Q1.2 R5.1 | length 125.8
  Bottom Layer w12: Q1.2 171.13,1051.03 182.5,1062.4 182.5,1111.35 R5.1
NetQ2_1: Q2.1 R9.1 R14.2 | length 154.8
  Bottom Layer w15: Q2.1 324.35,944.15 R9.1 325.2,873.75 R14.2
NetQ2_2: Q2.2 R6.1 | length 120.8
  Bottom Layer w15: Q2.2 302.83,1051.03 314.7,1062.9 314.7,1120.45 R6.1
NetQ3_1: Q3.1 R10.1 R12.2 | length 157.6
  Bottom Layer w15: Q3.1 464.25,936.55 R12.2
NetQ3_2: Q3.2 R7.1 | length 114.2
  Bottom Layer w15: Q3.2 430.93,1051.03 447.1,1067.2 447.1,1130.55 R7.1
NetQ5_1: Q5.1 R40.1 R42.2 | length 197.3
  Top Layer w20: Q5.1 2612.36,1234.31 R42.2@2620.15,1242.1 ; R42.2 2645.9,1241.5 2655.18,1250.78 2655.18,1294.58 2673.6,1313 R40.1
NetQ5_2: Q5.2 R41.2 U5.4 | length 619.6
  Top Layer w12: Q5.2 2451.77,1212.83 2483.8,1180.8 2681,1180.8 2721.9,1139.9 2721.9,988.6 2711.1,977.8 R41.2@2685.4,977.8 ; U5.4 R41.2@2685.4,970
NetR2_2: R2.2 U3.1 | length 89.2
  Top Layer w20: U3.1 1720.8,278.41 R2.2
NetR5_2: R5.2 U1.1 | length 182.3
  Bottom Layer w15: R5.2 88.85,1230.35 111.76,1253.26 U1.1
NetR6_2: R6.2 U1.2 | length 247.1
  Bottom Layer w15: U1.2 210.4,1332 230.15,1312.25 R6.2
NetR7_2: R7.2 U1.4 | length 568.4
  Bottom Layer w12: U1.4 129.08,1489.48 115.1,1475.5 115.1,1387.2 130.1,1372.2 239.8,1372.2 372.65,1239.35 R7.2
NetR15_1: R15.1 R16.2 U5.3 | length 187.9
  Top Layer w25: R15.1 2635.8,753.6 ; U5.3 2617.3,814.8 2635.8,796.3 2635.8,753.6 ; R16.2 2671.5,753.6 2635.8,753.6
NetR21_1: R21.1 U9.8 | length 95.9
  Top Layer w11: R21.1 1960.06,1211.7 U9.8@1965.7,1206.06
NetR24_2: R24.2 U9.2 | length 197.6
  Top Layer w15: R24.2@1944.1,846.45 1998.25,846.45 2017.1,865.3 U9.2
NetR38_1: R38.1 STS1.2
RGB1_BLUE: R8.1 U10.27 | length 2006.9
  Top Layer w11: v2(171.3,751.4) 228.4,808.5 392.8,808.5 431.4,847.1 431.4,1057.1 538.8,1164.5 596,1164.5 624.1,1136.4 768.7,1136.4 v1@798.8,1166.5 ; v1@808.6,1246.7 849.6,1287.7 1136.6,1287.7 1167.7,1256.6 1167.7,1131.8 1214.9,1084.6 v2(1255.6,1084.6) ; v2(1334.7,1073.2) 1364.27,1043.63 U10.27
  Bottom Layer w11: R8.1 140.5,874.6 150.3,864.8 150.3,772.4 v2(171.3,751.4) ; v1(798.5,1166.6) 798.5,1236.8 v1(808,1246.3) ; v2(1255.6,1084.6) 1267,1073.2 v2(1334.7,1073.2)
RGB1_GRE: R9.2 U10.26 | length 1791.4
  Top Layer w11: v2(290.3,838.1) 321.5,838.1 339.3,855.9 339.3,1072.7 493.35,1226.75 636.25,1226.75 661.7,1201.3 694.8,1201.3 v1@709.4,1215.9 ; v1(778.3,1251.4) 778.3,1282 802.5,1306.2 1144.26,1306.2 1186.2,1264.26 1186.2,1142.1 1208.6,1119.7 v2(1270.7,1119.7) ; v2(1364,1101.7) 1383.96,1081.74 U10.26
  Bottom Layer w11: R9.2 283.1,874.6 290,867.7 290,838.4 v2(290.3,838.1) ; v1(708.1,1214.8) 741.7,1214.8 v1(778.3,1251.4) ; v2(1270.7,1119.7) 1288.7,1101.7 v2(1364,1101.7)
RGB1_RED: R10.2 U10.25 | length 1903.5
  Top Layer w11: v1(511.5,1012.4) 511.5,1047.5 530.7,1066.7 854.4,1066.7 892,1104.3 892,1258 v1(889.3,1260.7) ; v1(997.2,1333.9) 1002.8,1328.3 1148.33,1328.3 1204.7,1271.93 1204.7,1163.8 1219.1,1149.4 v2(1298.2,1149.4) ; v2(1392.5,1129.2) 1403.64,1118.06 U10.25
  Bottom Layer w11: R10.2 418.6,874.6 426.85,866.35 426.85,782.09 455,753.94 495.44,753.94 511.2,769.7 v1@511.2,1014.6 ; v1(889.3,1260.7) 896.7,1260.7 970.6,1334.6 971.3,1333.9 v1(997.2,1333.9) ; v2(1298.2,1149.4) 1318.4,1129.2 v2(1392.5,1129.2)
RST: C32.2 R35.2 S2.2 U10.7 | length 1553.6
  Top Layer w12: U10.7 1305.21,587.39 1315.15,577.45 1315.15,556.48 1331.41,540.21 1331.41,485.72 1342.99,474.15 1426.9,474.15 C32.2 1438.9,464 1452.7,450.2 1565.5,450.2 ; v1@1565.5,387.4 1565.5,450.2 ; R35.2 1589.2,473.9 1565.5,450.2 ; v1@2011.8,160.6 2032.3,181.1 2296.4,181.1 2322.9,154.6 S2.2
  Bottom Layer w12: v1(1565.3,388.6) 1834.7,119.2 1971,119.2 v1@2010.6,158.8
  other v1: 2011.8,159.3
RXD1: R26.2 U10.31 | length 241.1
  Top Layer w12: U10.31 1285.53,1095.53 1344.8,1154.8 R26.2
RXD2: R29.2 R31.2 U10.13 | length 2849.4
  Top Layer w12: R29.2 374.95,1074.15 505.9,1205.1 624,1205.1 648.8,1180.3 723.4,1180.3 v1(723.8,1180.7) ; v1(1287.2,891) 1301.2,877 1301.2,770.8 v1(1350.2,721.8) ; v1@1434.2,672.8 1434.2,685.06 U10.13 1582.15,707.65 1603.4,686.4 1680.9,686.4 1706.3,711.8 1737.1,711.8 1748.7,723.4 1748.7,889.7 1722.8,915.6 1722.8,1088.1 v1@1734.1,1099.4 ; v1(1861.9,1263.4) 1861.9,1273.2 1970,1381.3 1970,1477.07 1979.33,1486.4 R31.2
  Bottom Layer w12: v1(723.8,1180.7) 723.8,1140.8 867.7,996.9 1272.4,996.9 1291.2,978.1 1291.2,895 v1(1287.2,891) ; v1@1351.5,723.8 1405.2,670.1 v1(1435.4,670.1) ; v1(1736.6,1099.7) 1861.9,1225 v1(1861.9,1263.4)
RXD3: R37.2 U10.22 | length 464.6
  Top Layer w12: U10.22 1599.22,884.82 1653.6,939.2 R37.2
SCL: U10.42
SDA: U10.43
SWCLK: J5.2 U10.37 | length 635.3
  Top Layer w10: U10.37 1133.96,923.5 1342.2,923.5 v1@1360.2,905.5
  Bottom Layer w10: v1@1357.1,907.9 1357.1,1023.5 1525.8,1192.2 J5.2
  other v1: 1357.2,907.4
SWDIO: J5.3 U10.34 | length 449.9
  Top Layer w12: U10.34 v2@1226.47,1053.1
  Bottom Layer w12: v2(1226.8,1052) 1236.2,1042.6 1347.6,1042.6 1475.8,1170.8 J5.3
TXD1: R27.2 U10.30 | length 441.6
  Top Layer w12: R27.2 1258.2,1218.5 1269.5,1229.8 1378.6,1229.8 1390.1,1218.3 1390.1,1166.8 1305.21,1081.91 U10.30
TXD2: R30.2 R32.2 U10.12 | length 3099.5
  Top Layer w10: v1(1319.7,897) 1319.7,786.1 1402.95,702.85 1402.95,655.19 U10.12
  Top Layer w12: R30.2 399.1,890.3 410.5,901.7 410.5,1067.6 526.4,1183.5 606.8,1183.5 634.9,1155.4 747.1,1155.4 v1(753.3,1161.6) ; U10.12 1403.64,612.66 1411,605.3 1495.1,605.3 1522.2,632.4 1832.1,632.4 1843,643.3 1843,702.1 1828.7,716.4 1828.7,957.9 1812.5,974.1 1761,974.1 1745.6,989.5 1745.6,1066.7 v1(1748.3,1069.4) ; v1(1892.7,1262.9) 1892.7,1276.42 2002.7,1386.42 R32.2
  Bottom Layer w12: v1(753.3,1161.6) 753.3,1145 880.2,1018.1 1313.9,1018.1 1332.1,999.9 1332.1,909.4 v1(1319.7,897) ; v1(1748.3,1069.4) 1748.3,1072.8 1892.7,1217.2 v1(1892.7,1262.9)
TXD3: R39.2 U10.21 | length 527.3
  Top Layer w11: U10.21 1621.53,865.13 1679.3,922.9 1679.3,1137.9 R39.2
USB_DM: U10.32
USB_DP: U10.33
VAGND: JR1.1 U10.8 | length 305.1
  Top Layer w12: U10.8 1324.9,595.28 1372.68,547.5 1427.5,547.5 1449.7,525.3 1493.8,525.3 1511,508.1 JR1.1
pads on no net: J1. J2. J3. J4. S1.3 S2.3 SW1.3 SW1.4 SW1.5 U5.6 U7.3 U8.4 U10.2 U10.3 U10.4 U10.11 U10.14 U10.15 U10.18 U10.28 U10.29 U10.38 U10.39 U10.40 U10.45
copper on no net:
  other v3: 2650.3,105.6 866.7,105.91 106,107.01 2651.1,1445.6 866.9,1445.8

## Keep-outs
Keep-Out Layer:
  lines w5: -0.35,48.35 ccw(c47.23,47.37) 44.9,-0.16 ; 0,47.5 0,1508.9 ; 0.29,1507.53 cw(c47.77,1504.43) 50.1,1551.96 ; 44.3,0 2706.5,0 ; 48.8,1551.96 2712.8,1551.96 ; 2705.73,0.39 ccw(c2709.43,47.83) 2756.6,41.55 ; 2711.6,1551.96 cw(c2709.27,1504.43) 2756.8,1502.1 2756.8,40.9

## Text inside footprints (layer, text, board x,y; h text height)
H1: Top Overlay "DC2.1" at 2614.1,513.38 h32 r270
U1: Top Overlay "B" at 127.4,1244.26 h32 r90; Top Overlay "G" at 127.4,1324.26 h32 r90; Top Overlay "V" at 128.4,1402.26 h32 r90; Top Overlay "R" at 131.4,1480.26 h32 r90